# EAGLE board Capacitacion_SMD (EAGLE 6.4)

Size 100 x 80 mm. Coordinates in mm from the lower left corner, seen from the top.
Outline: 0,0 100,0 100,80 0,80 0,0
Copper layers (1*16): Top 0.035mm / dielectric 1.5mm / Bottom 0.035mm
Design rules "default": minimum track width 10mil, minimum drill 24mil, track to track 8mil, track to pad 8mil, pad to pad 8mil, via to via 8mil, smd to smd 8mil, copper to edge 40mil, drill to drill 8mil, minimum pad ring 10mil, minimum via ring 8mil, stop-mask expansion 4mil, vias tented up to drill 0mil, thermal gap 10mil

## Footprints (pad centres in the part's own frame; a part is rotated, then mirrored left to right if it is on the bottom)
CAP-PTH-SMALL-KIT = drill 1.016 pad 2.032: 1 -1.397,0; 2 1.397,0
78XXL = drill 1.016 long: GND 0,-3.81; IN -2.54,-3.81; OUT 2.54,-3.81 | hole 3.302: 0,11.176
AVRISP = drill 0.9 pad 1.626: 1 -1.27,2.54; 2 1.27,2.54; 3 -1.27,0; 4 1.27,0; 5 -1.27,-2.54; 6 1.27,-2.54
1X12 = drill 1.016 pad 1.88: 1 0,0; 2 2.54,0; 3 5.08,0; 4 7.62,0; 5 10.16,0; 6 12.7,0; 7 15.24,0; 8 17.78,0; 9 20.32,0; 10 22.86,0; 11 25.4,0; 12 27.94,0
LED5MM = drill 0.813 pad 1.88: A -1.27,0; K 1.27,0
QS = drill 0.61 long: 1 -2.54,0; 2 2.54,0
TO220V = drill 1.016 long: 1 -2.54,-2.54; 2 0,-2.54; 3 2.54,-2.54
AXIAL-0.3 = drill 0.9 pad 1.88: P$1 -3.81,0; P$2 3.81,0
TACTILE-PTH = drill 1.016 pad 1.88: 1 -3.251,2.261; 2 3.251,2.261; 3 -3.251,-2.261; 4 3.251,-2.261
SPARKFUN-DIGITALIC_TQFP44 = smd 1.5 x 0.5: 1 -5.8,4; 2 -5.8,3.2; 3 -5.8,2.4; 4 -5.8,1.6; 5 -5.8,0.8; 6 -5.8,0; 7 -5.8,-0.8; 8 -5.8,-1.6; 9 -5.8,-2.4; 10 -5.8,-3.2; 11 -5.8,-4; 23 5.8,-4; 24 5.8,-3.2; 25 5.8,-2.4; 26 5.8,-1.6; 27 5.8,-0.8; 28 5.8,0; 29 5.8,0.8; 30 5.8,1.6; 31 5.8,2.4; 32 5.8,3.2; 33 5.8,4 | smd 0.5 x 1.5: 12 -4,-5.8; 13 -3.2,-5.8; 14 -2.4,-5.8; 15 -1.6,-5.8; 16 -0.8,-5.8; 17 0,-5.8; 18 0.8,-5.8; 19 1.6,-5.8; 20 2.4,-5.8; 21 3.2,-5.8; 22 4,-5.8; 34 4,5.8; 35 3.2,5.8; 36 2.4,5.8; 37 1.6,5.8; 38 0.8,5.8; 39 0,5.8; 40 -0.8,5.8; 41 -1.6,5.8; 42 -2.4,5.8; 43 -3.2,5.8; 44 -4,5.8
USB-B-PTH = drill 0.914 pad 1.676: D+ 0,1.25; D- 1.981,1.25; GND 0,-1.25; VBUS 1.981,-1.25 | drill 2.286: S1 -2.718,-6.02; S2 -2.718,6.02
RPI-1031 = smd 1.35 x 0.9: 1 1.175,-1.4; 2 1.175,0; 3 1.175,1.4; 4 -1.175,-1.4; 5 -1.175,0; 6 -1.175,1.4
APDS-9960 = smd 0.6 x 0.72: 1 -0.7,1.455; 2 -0.7,0.485; 3 -0.7,-0.485; 4 -0.7,-1.455; 5 0.7,-1.455; 6 0.7,-0.485; 7 0.7,0.485; 8 0.7,1.455

## Placement (x,y rotation side)
C1  0.1uF  [CAP-PTH-SMALL-KIT]  43.18,35.56 0 top
C2  18pF  [CAP-PTH-SMALL-KIT]  35.56,3.81 0 top
C3  18pF  [CAP-PTH-SMALL-KIT]  35.56,22.86 0 top
C4  22pF  [CAP-PTH-SMALL-KIT]  25.4,43.18 90 top
C5  22pF  [CAP-PTH-SMALL-KIT]  29.21,43.18 90 top
C6  22pF  [CAP-PTH-SMALL-KIT]  81.28,39.37 90 top
C7  22pF  [CAP-PTH-SMALL-KIT]  85.09,39.37 90 top
IC1  LDO3V3  [78XXL]  17.78,44.45 90 top
ISP1  AVRISP-6  [AVRISP]  17.78,17.78 90 top
JP1  M12PTH  [1X12]  2.54,2.54 0 top
JP2  M12PTH  [1X12]  30.48,22.86 180 top
LED1  [LED5MM]  54.61,27.94 0 top
LED2  [LED5MM]  76.2,25.4 0 top
LED3  [LED5MM]  57.15,5.08 90 top
LED4  [LED5MM]  64.77,5.08 90 top
LED5  [LED5MM]  72.39,5.08 90 top
LED6  [LED5MM]  80.01,5.08 90 top
Q1  [QS]  44.45,12.7 90 top
Q2  [TO220V]  31.75,45.72 90 top
Q3  [TO220V]  39.37,45.72 90 top
Q4  [TO220V]  46.99,45.72 90 top
R1  22  [AXIAL-0.3]  45.72,29.21 0 top
R2  22  [AXIAL-0.3]  16.51,33.02 0 top
R3  10k  [AXIAL-0.3]  38.1,20.32 0 top
R4  470  [AXIAL-0.3]  54.61,17.78 0 top
R5  470  [AXIAL-0.3]  55.88,10.16 0 top
R6  10k  [AXIAL-0.3]  52.07,7.62 0 top
R7  22k  [AXIAL-0.3]  58.42,13.97 0 top
R8  22k  [AXIAL-0.3]  49.53,16.51 0 top
R9  10k  [AXIAL-0.3]  55.88,44.45 90 top
R10  10k  [AXIAL-0.3]  59.69,44.45 90 top
R11  10k  [AXIAL-0.3]  63.5,44.45 90 top
R12  10k  [AXIAL-0.3]  67.31,44.45 90 top
R13  10k  [AXIAL-0.3]  71.12,44.45 90 top
R14  10k  [AXIAL-0.3]  74.93,44.45 90 top
R15  22  [AXIAL-0.3]  78.74,40.64 90 top
R16  470  [AXIAL-0.3]  86.36,6.35 90 top
R17  470  [AXIAL-0.3]  90.17,6.35 90 top
R18  470  [AXIAL-0.3]  93.98,6.35 90 top
R19  470  [AXIAL-0.3]  97.79,6.35 90 top
S1  [TACTILE-PTH]  16.51,8.89 180 top
U$1  ATMEGA32U4TQFP  [SPARKFUN-DIGITALIC_TQFP44]  29.21,12.7 45 top
U$2  USBPTH  [USB-B-PTH]  8.89,12.7 0 top
U$3  RPI-1031  [RPI-1031]  49.53,12.7 0 top
U$4  APDS-9960  [APDS-9960]  49.53,12.7 180 top

## Library data of the parts
C1-C7 = SparkFun-Capacitors; PROD_ID: CAP-08370
IC1 = v-reg
ISP1 Q2-Q4 = adafruit
JP1 JP2 = SparkFun-Connectors
LED1-LED6 = SparkFun-LED
Q1 = special
R1-R19 = SparkFun-Resistors
S1 = SparkFun-Electromechanical
U$1 = SparkFun-DigitalIC
U$2 = SparkFun-Connectors; PROD_ID: CONN-08278
U$3 U$4 = custom_components

## Nets
3V3_PWR: C5.1 C7.1 IC1.OUT Q2.1 Q3.1 Q4.1 R10.P$2 R12.P$2 R14.P$2 R15.P$1 U$4.5
5V: C4.1 IC1.IN ISP1.2 JP2.10 R3.P$2 R6.P$2 R9.P$2 R11.P$2 R13.P$2 U$1.2 U$1.7 U$1.14 U$1.24 U$1.34 U$1.44 U$2.VBUS U$3.2 U$3.5
A1: Q2.3 R10.P$1 U$4.1
A2: Q4.3 R14.P$1 U$4.7
A3: Q3.3 R12.P$1 U$4.2
AREF_SIG: JP2.11 U$1.42
B1: JP1.9 Q2.2 R9.P$1 U$1.19
B2: JP1.10 Q4.2 R13.P$1 U$1.18
B3: JP2.2 Q3.2 R11.P$1 U$1.1
GND: C1.1 C2.2 C3.2 C4.2 C5.2 C6.2 C7.2 IC1.GND ISP1.6 JP2.12 LED1.K LED2.K LED3.K LED4.K LED5.K LED6.K R7.P$1 R8.P$1 S1.1 S1.2 U$1.5 U$1.15 U$1.23 U$1.35 U$1.43 U$2.GND U$3.3 U$4.6
HWB_SIG: JP2.9 U$1.33
LED1_SIG: JP2.5 R16.P$2 U$1.30
LED2_SIG: JP2.6 R17.P$2 U$1.12
LED3_SIG: JP2.7 R18.P$2 U$1.26
LED4_SIG: JP2.8 R19.P$2 U$1.32
MISO_SIG: ISP1.1 U$1.11
MOSI_SIG: ISP1.4 U$1.10
N$1: R2.P$2 U$1.3
N$2: R1.P$2 U$1.4
N$3: R1.P$1 U$2.D+
N$4: R2.P$1 U$2.D-
N$5: JP2.1 U$1.27
N$6: C1.2 U$1.6
N$7: C3.1 Q1.2 U$1.16
N$8: C2.1 Q1.1 U$1.17
N$9: LED3.A R16.P$1
N$10: JP2.3 U$1.28
N$11: LED1.A R4.P$1
N$12: LED2.A R5.P$1
N$13: JP1.1 U$1.36
N$14: JP1.2 U$1.37
N$15: JP1.3 U$1.38
N$16: JP1.4 U$1.39
N$17: JP1.5 U$1.40
N$18: JP1.6 U$1.41
N$19: JP1.7 U$1.20
N$20: JP1.8 U$1.21
N$21: LED4.A R17.P$1
N$22: LED5.A R18.P$1
N$23: LED6.A R19.P$1
N$25: JP2.4 U$1.29
N$30: R6.P$1 U$3.6
N$31: U$4.3 U$4.4
N$32: C6.1 R15.P$2 U$4.8
RST_SIG: ISP1.5 R3.P$1 S1.3 S1.4 U$1.13
RXL_SIG: R4.P$2 U$1.8
S1_SIG: JP1.11 R7.P$2 U$1.25 U$3.4
S2_SIG: JP1.12 R8.P$2 U$1.31 U$3.1
SCK_SIG: ISP1.3 U$1.9
TXL_SIG: R5.P$2 U$1.22

## Tracks (layer width: path | path; a pad name or v marks a point on that pad's centre or on a via)
3V3_PWR  (10 unrouted)
5V  (17 unrouted)
A1  (2 unrouted)
A2  (2 unrouted)
A3  (2 unrouted)
AREF_SIG  (1 unrouted)
B1  (3 unrouted)
B2  (3 unrouted)
B3  (3 unrouted)
GND  (27 unrouted)
HWB_SIG  (1 unrouted)
LED1_SIG  (2 unrouted)
LED2_SIG  (2 unrouted)
LED3_SIG  (2 unrouted)
LED4_SIG  (2 unrouted)
MISO_SIG  (1 unrouted)
MOSI_SIG  (1 unrouted)
N$1  (1 unrouted)
N$2  (1 unrouted)
N$3  (1 unrouted)
N$4  (1 unrouted)
N$5  (1 unrouted)
N$6  (1 unrouted)
N$7  (2 unrouted)
N$8  (2 unrouted)
N$9  (1 unrouted)
N$10  (1 unrouted)
N$11  (1 unrouted)
N$12  (1 unrouted)
N$13  (1 unrouted)
N$14  (1 unrouted)
N$15  (1 unrouted)
N$16  (1 unrouted)
N$17  (1 unrouted)
N$18  (1 unrouted)
N$19  (1 unrouted)
N$20  (1 unrouted)
N$21  (1 unrouted)
N$22  (1 unrouted)
N$23  (1 unrouted)
N$25  (1 unrouted)
N$30  (1 unrouted)
N$31  (1 unrouted)
N$32  (2 unrouted)
RST_SIG  (4 unrouted)
RXL_SIG  (1 unrouted)
S1_SIG  (3 unrouted)
S2_SIG  (3 unrouted)
SCK_SIG  (1 unrouted)
TXL_SIG  (1 unrouted)